# EAGLE board bootloader (EAGLE 9.5.1)
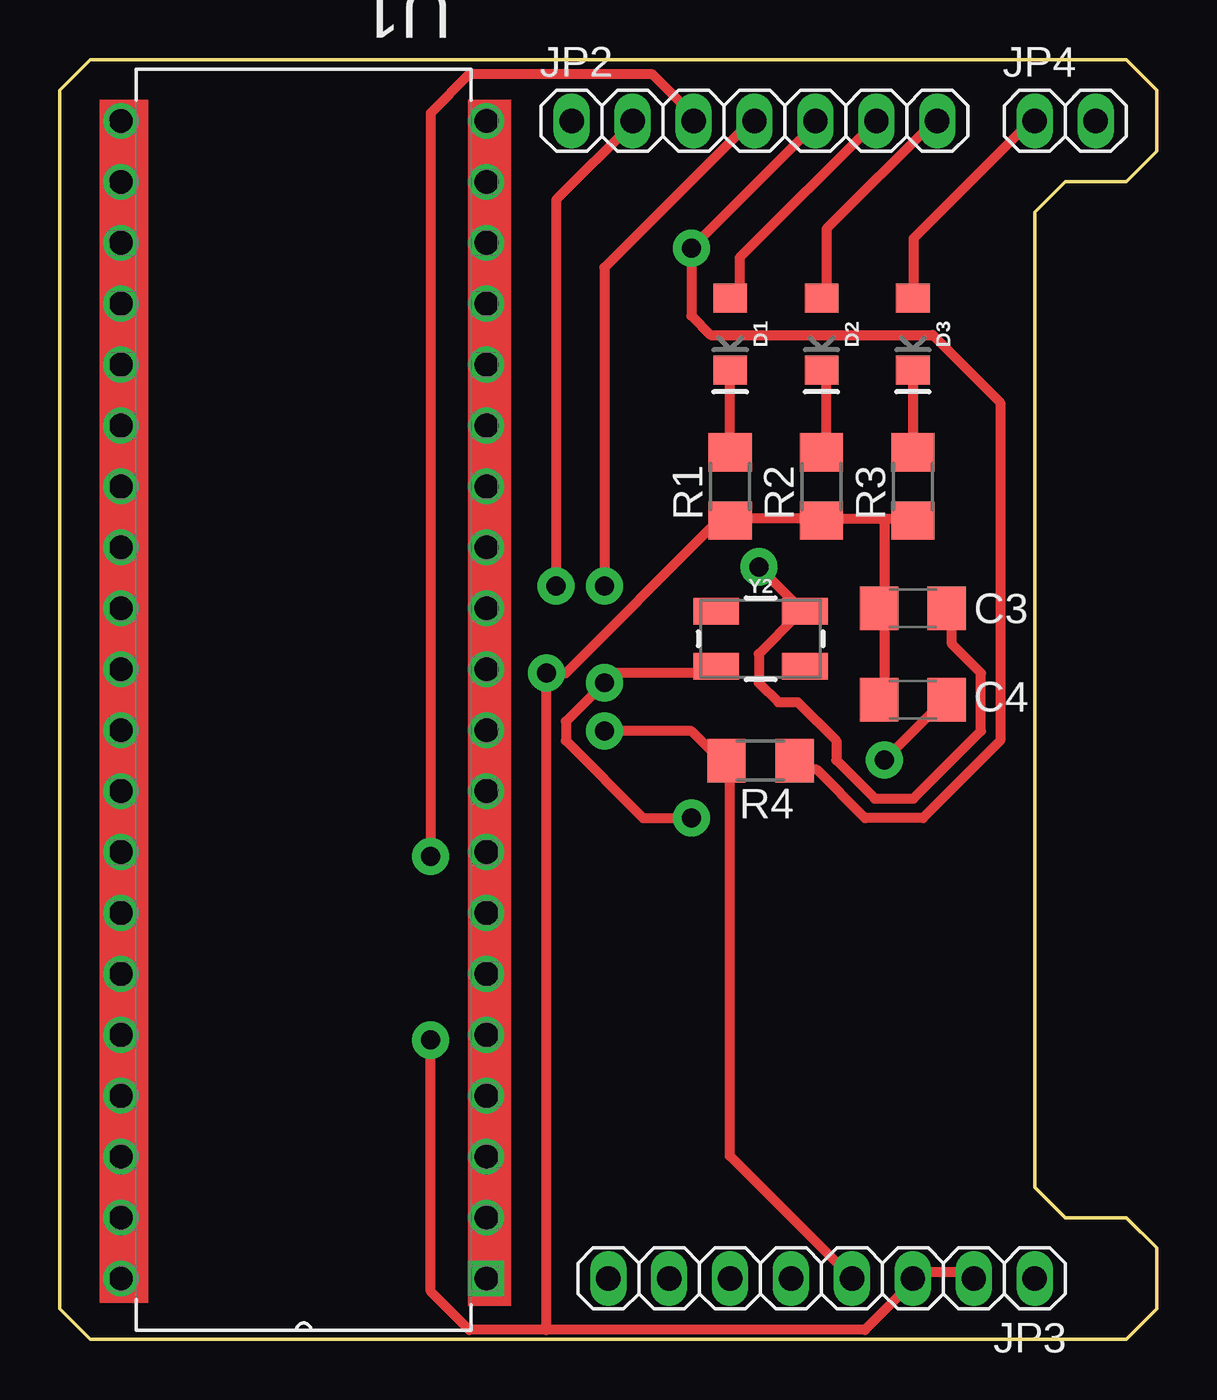
[diagram p0: board, top side]
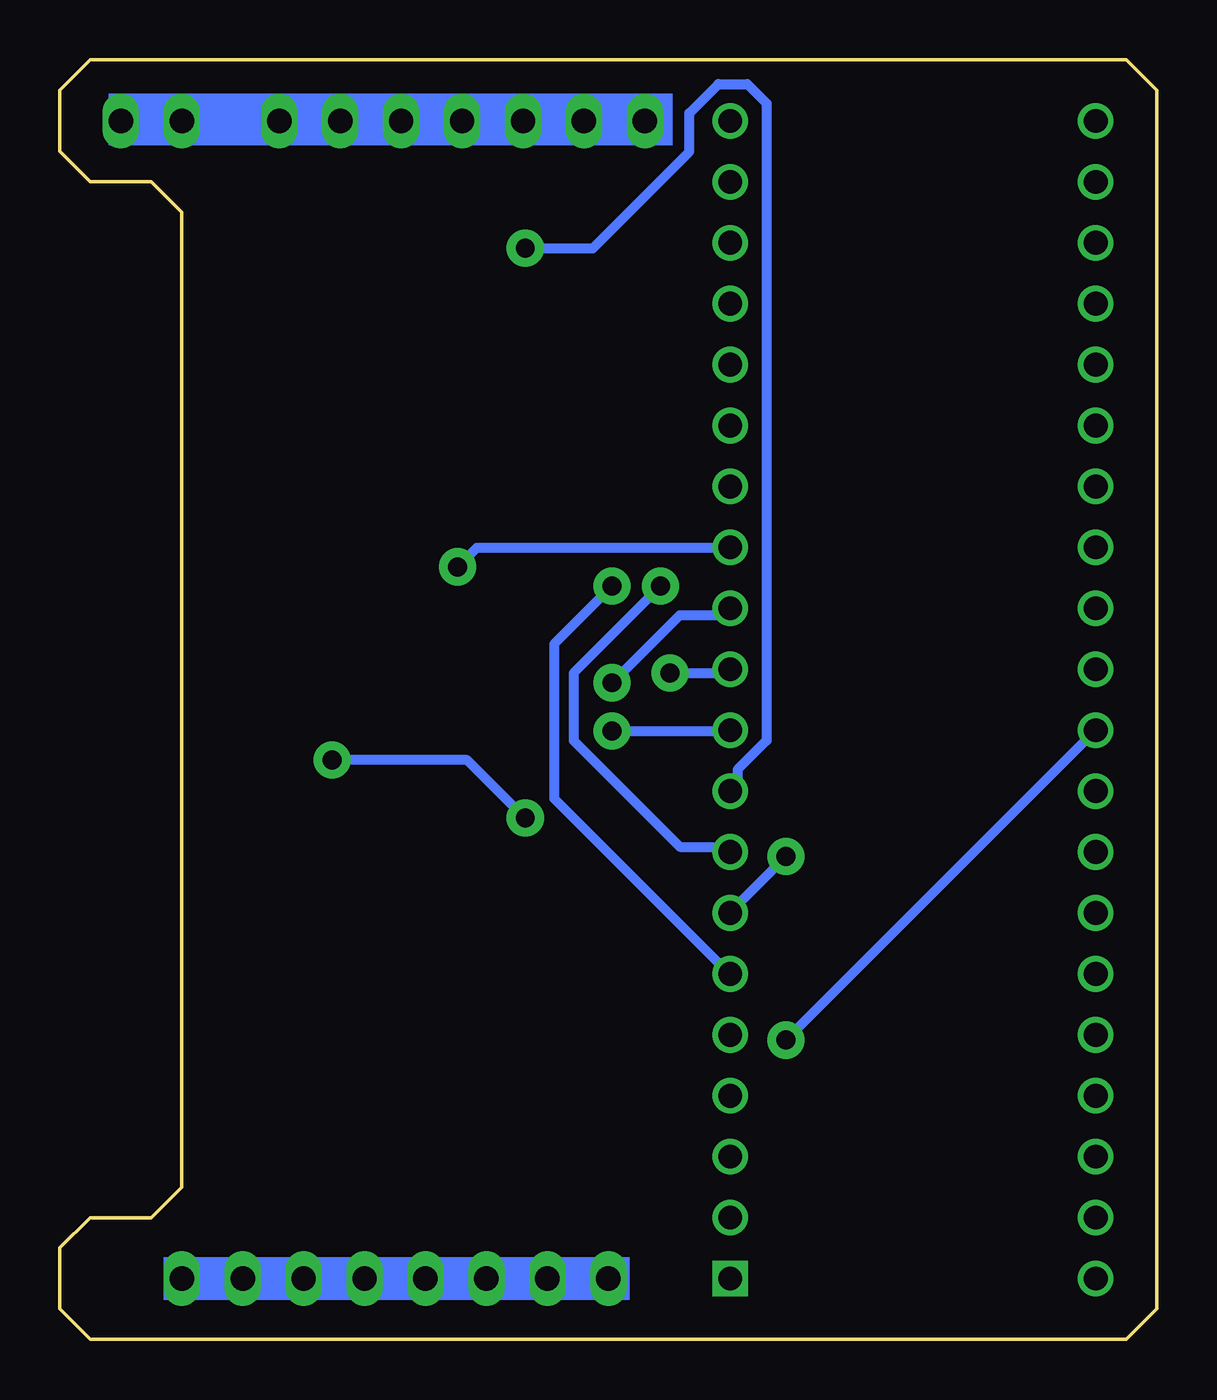
[diagram p1: board, bottom side, seen from below]

Size 45.72 x 53.34 mm. Coordinates in mm from the lower left corner, seen from the top.
Outline: 0,52.07 0,1.27 1.27,0 44.45,0 45.72,1.27 45.72,3.81 44.45,5.08 41.91,5.08 40.64,6.35 40.64,46.99 41.91,48.26 44.45,48.26 45.72,49.53 45.72,52.07 44.45,53.34 1.27,53.34 0,52.07
Copper layers (1*16): Top 0.035mm / dielectric 1.5mm / Bottom 0.035mm
Design rules "OthermillDRC_1_64_v2": minimum track width 16mil, minimum drill 31mil, track to track 0.39878125mm, track to pad 0.39878125mm, pad to pad 0.39878125mm, via to via 0.39878125mm, smd to smd 0mil, copper to edge 0mil, drill to drill 1mil, minimum pad ring 0mil, minimum via ring 15mil, stop-mask expansion 1mil, vias tented up to drill 30mil, thermal gap 10mil

## Footprints (pad centres in the part's own frame; a part is rotated, then mirrored left to right if it is on the bottom)
C1206 = smd 1.6 x 1.8: 1 -1.4,0; 2 1.4,0
LED-1206 = smd 1.2 x 1.4: A -1.5,0; C 1.5,0
1X07 = drill 1.016 long: 1 -7.62,0; 2 -5.08,0; 3 -2.54,0; 4 0,0; 5 2.54,0; 6 5.08,0; 7 7.62,0
1X08 = drill 1.016 long: 1 -8.89,0; 2 -6.35,0; 3 -3.81,0; 4 -1.27,0; 5 1.27,0; 6 3.81,0; 7 6.35,0; 8 8.89,0
1X02 = drill 1.016 long: 1 -1.27,0; 2 1.27,0
R1206 = smd 1.6 x 1.803: 1 -1.422,0; 2 1.422,0
DIP254P1524X483-40 = drill 0.991 square: 1 -7.62,24.13 | drill 0.991: 2 -7.62,21.59; 3 -7.62,19.05; 4 -7.62,16.51; 5 -7.62,13.97; 6 -7.62,11.43; 7 -7.62,8.89; 8 -7.62,6.35; 9 -7.62,3.81; 10 -7.62,1.27; 11 -7.62,-1.27; 12 -7.62,-3.81; 13 -7.62,-6.35; 14 -7.62,-8.89; 15 -7.62,-11.43; 16 -7.62,-13.97; 17 -7.62,-16.51; 18 -7.62,-19.05; 19 -7.62,-21.59; 20 -7.62,-24.13; 21 7.62,-24.13; 22 7.62,-21.59; 23 7.62,-19.05; 24 7.62,-16.51; 25 7.62,-13.97; 26 7.62,-11.43; 27 7.62,-8.89; 28 7.62,-6.35; 29 7.62,-3.81; 30 7.62,-1.27; 31 7.62,1.27; 32 7.62,3.81; 33 7.62,6.35; 34 7.62,8.89; 35 7.62,11.43; 36 7.62,13.97; 37 7.62,16.51; 38 7.62,19.05; 39 7.62,21.59; 40 7.62,24.13
CRYSTAL-SMD-5X3.2-4PAD = smd 1.9 x 1.1: 1 -1.85,-1.15; 2 1.85,-1.15; 3 1.85,1.15; 4 -1.85,1.15

## Placement (x,y rotation side)
C3  22pF  [C1206]  35.56,30.48 0 top
C4  22pF  [C1206]  35.56,26.67 0 top
D1  [LED-1206]  27.94,41.91 270 top
D2  [LED-1206]  31.75,41.91 270 top
D3  [LED-1206]  35.56,41.91 270 top
JP2  [1X07]  28.96,50.8 0 top
JP3  [1X08]  31.75,2.54 180 top
JP4  [1X02]  41.91,50.8 0 top
R1  330  [R1206]  27.94,35.56 90 top
R2  330  [R1206]  31.75,35.56 90 top
R3  330  [R1206]  35.56,35.56 90 top
R4  10k  [R1206]  29.21,24.13 0 top
U1  ATMEGA1284P-PU  [DIP254P1524X483-40]  10.16,26.67 180 top
Y2  16MHz  [CRYSTAL-SMD-5X3.2-4PAD]  29.21,29.21 0 top

## Library data of the parts
C3 C4 = rcl; SPICEPREFIX: C
D1-D3 = SparkFun-LED
JP2-JP4 = pinhead
R1-R3 = adafruit
R4 = rcl; SPICEPREFIX: R
U1 = ATMEGA1284P-PU_ExploraTec; AVAILABILITY: Unavailable; DESCRIPTION: ATmega Series 20 MHz 128 KB Flash 16 KB SRAM 8-Bit Microcontroller - DIP-40; MF: Microchip; MP: ATMEGA1284P-PU; PACKAGE: PDIP-40 Microchip; PRICE: None
Y2 = SparkFun-Clocks

## Nets
AMARILLO: D3.A JP4.1
AVCC: U1.30
D11: JP2.4 U1.6
D12: JP2.3 U1.7
D13: JP2.2 U1.8
GND: C3.1 C4.1 JP3.2 JP3.3 R1.1 R2.1 R3.1 U1.11 U1.31
N$1: D1.C R1.2
N$2: D2.C R2.2
N$3: D3.C R3.2
N$6: C4.2 U1.12 Y2.1
N$7: C3.2 U1.13 Y2.3
RES: JP2.5 R4.2 U1.9
ROJO: D2.A JP2.7
VCC: JP3.4 R4.1 U1.10
VERDE: D1.A JP2.6

## Tracks (layer width: path | path; a pad name or v marks a point on that pad's centre or on a via)
AMARILLO
  Top 0.406: D3.A 35.58,43.48 35.58,45.9 40.41,50.73 JP4.1
D11  (via drill 0.79)
  Top 0.406: v22.7,31.4 22.7,44.69 28.74,50.73 JP2.4
  Bottom 0.406: v22.7,31.4 25.11,28.99 25.11,22.55 17.87,15.3 U1.6
D12  (via drill 0.79)
  Top 0.406: v15.45,20.13 15.45,51.13 17.06,52.74 24.71,52.74 26.32,51.13 JP2.3
  Bottom 0.406: v15.45,20.13 17.47,18.12 U1.7
D13  (via drill 0.79)
  Top 0.406: v20.69,31.4 20.69,47.51 23.91,50.73 JP2.2
  Bottom 0.406: v20.69,31.4 24.31,27.78 24.31,24.96 19.88,20.53 17.87,20.53 U1.8
GND  (via drill 0.79)
  Top 0.406: C4.1 34.37,26.97 34.37,30.19 C3.1 34.37,30.6 34.37,34.22 | 34.37,34.22 31.96,34.22 R2.1 31.56,34.22 28.34,34.22 R1.1 27.93,33.82 27.13,33.82 21.09,27.78 v20.28,27.78 20.28,0.4 | 34.37,34.22 35.18,34.22 R3.1 | v15.45,12.48 15.45,2.01 17.06,0.4 20.28,0.4 | 20.28,0.4 33.57,0.4 35.58,2.42 JP3.3 35.58,2.82 38,2.82 JP3.2
  Bottom 0.406: v20.28,27.78 17.87,27.78 U1.11 | v15.45,12.48 2.57,25.36 U1.31
N$1
  Top 0.406: D1.C 27.93,40.26 27.93,37.04 R1.2
N$2
  Top 0.406: D2.C 31.96,40.26 31.96,37.04 R2.2
N$3
  Top 0.406: D3.C 35.58,40.26 35.58,37.04 R3.2
N$6  (via drill 0.79)
  Top 0.406: v34.37,24.16 36.79,26.57 C4.2 | v26.32,21.74 24.31,21.74 21.09,24.96 21.09,25.77 v22.7,27.38 23.1,27.78 27.13,27.78 Y2.1
  Bottom 0.406: v34.37,24.16 28.74,24.16 v26.32,21.74 | v22.7,27.38 19.88,30.19 17.87,30.19 U1.12
N$7  (via drill 0.79)
  Top 0.406: C3.2 37.19,30.19 37.19,28.99 38.4,27.78 38.4,25.36 35.58,22.55 33.97,22.55 32.36,24.16 32.36,24.96 30.75,26.57 29.95,26.57 29.14,27.38 29.14,28.58 30.75,30.19 Y2.3 30.75,30.6 v29.14,32.21
  Bottom 0.406: v29.14,32.21 28.34,33.01 17.87,33.01 U1.13
RES  (via drill 0.79)
  Top 0.406: R4.2 30.75,23.75 31.56,23.75 33.57,21.74 35.98,21.74 39.2,24.96 39.2,39.05 36.39,41.87 27.13,41.87 26.32,42.67 v26.32,45.49 31.56,50.73 JP2.5
  Bottom 0.406: v26.32,45.49 23.5,45.49 19.48,49.52 19.48,51.13 18.27,52.34 17.06,52.34 16.26,51.53 16.26,24.96 17.47,23.75 17.47,22.95 U1.9
ROJO
  Top 0.406: D2.A 31.96,43.48 31.96,46.3 36.39,50.73 JP2.7
VCC  (via drill 0.79)
  Top 0.406: JP3.4 32.76,2.82 27.93,7.65 27.93,23.75 R4.1 27.53,24.16 26.32,25.36 v22.7,25.36
  Bottom 0.406: v22.7,25.36 17.87,25.36 U1.10
VERDE
  Top 0.406: D1.A 28.34,43.48 28.34,45.09 33.97,50.73 JP2.6
(copper drawn outside any net)
  shapes: Bottom area x2, Top area x2